# Altium PCB pcbgirl.pcbdoc
Units mil, origin at the board's own origin, x right, y up, seen from the top; angles counter-clockwise.
Board outline 5920 x 6080 mil, 2 copper layers (Top Layer, Bottom Layer); 2 components, 78 nets, 140 pads, 0 vias.
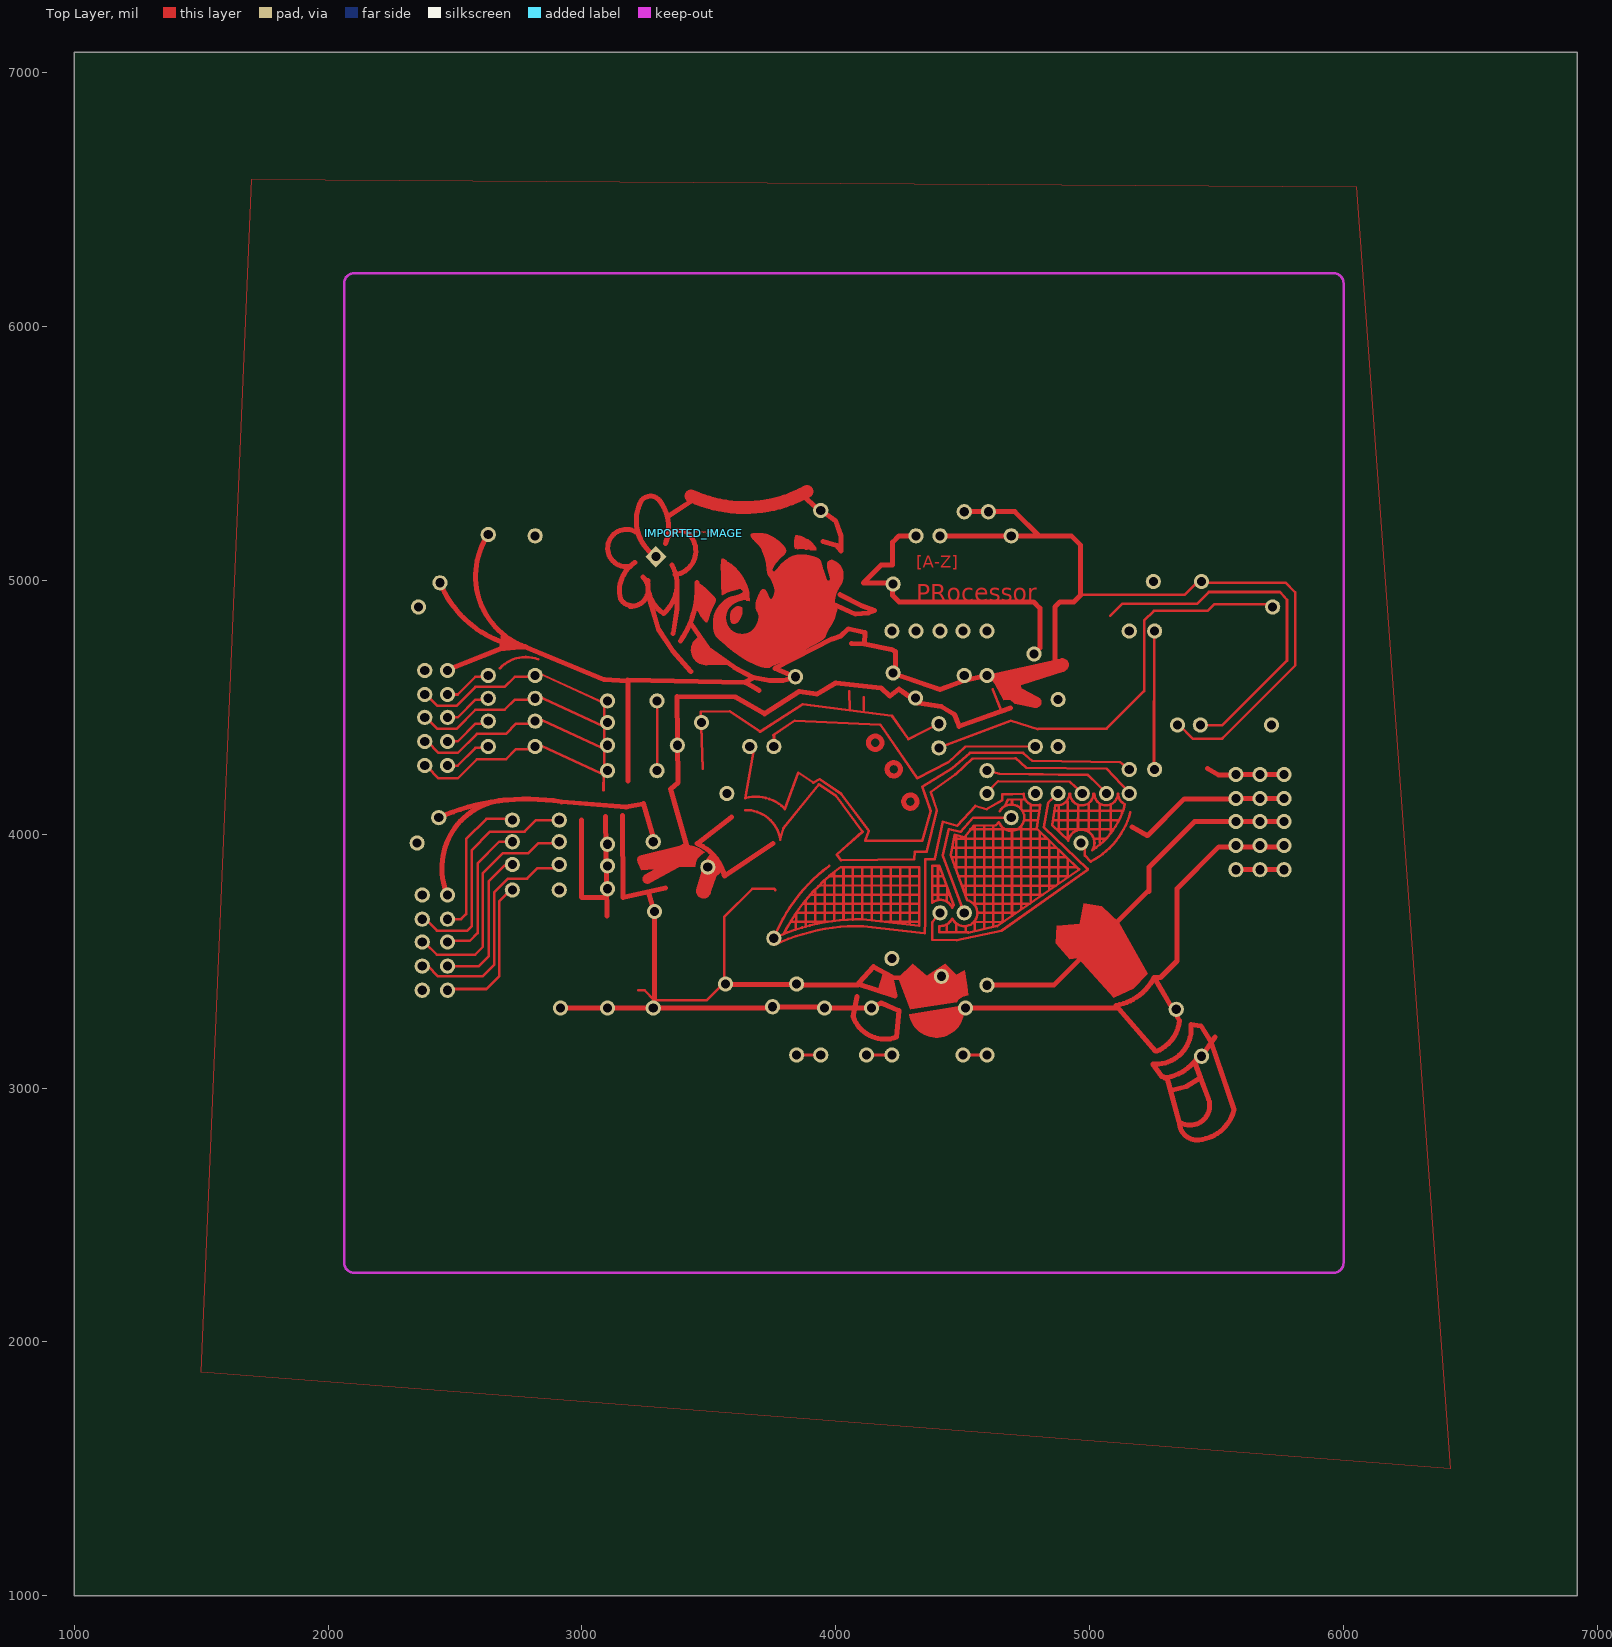
[diagram p0: Top Layer view]
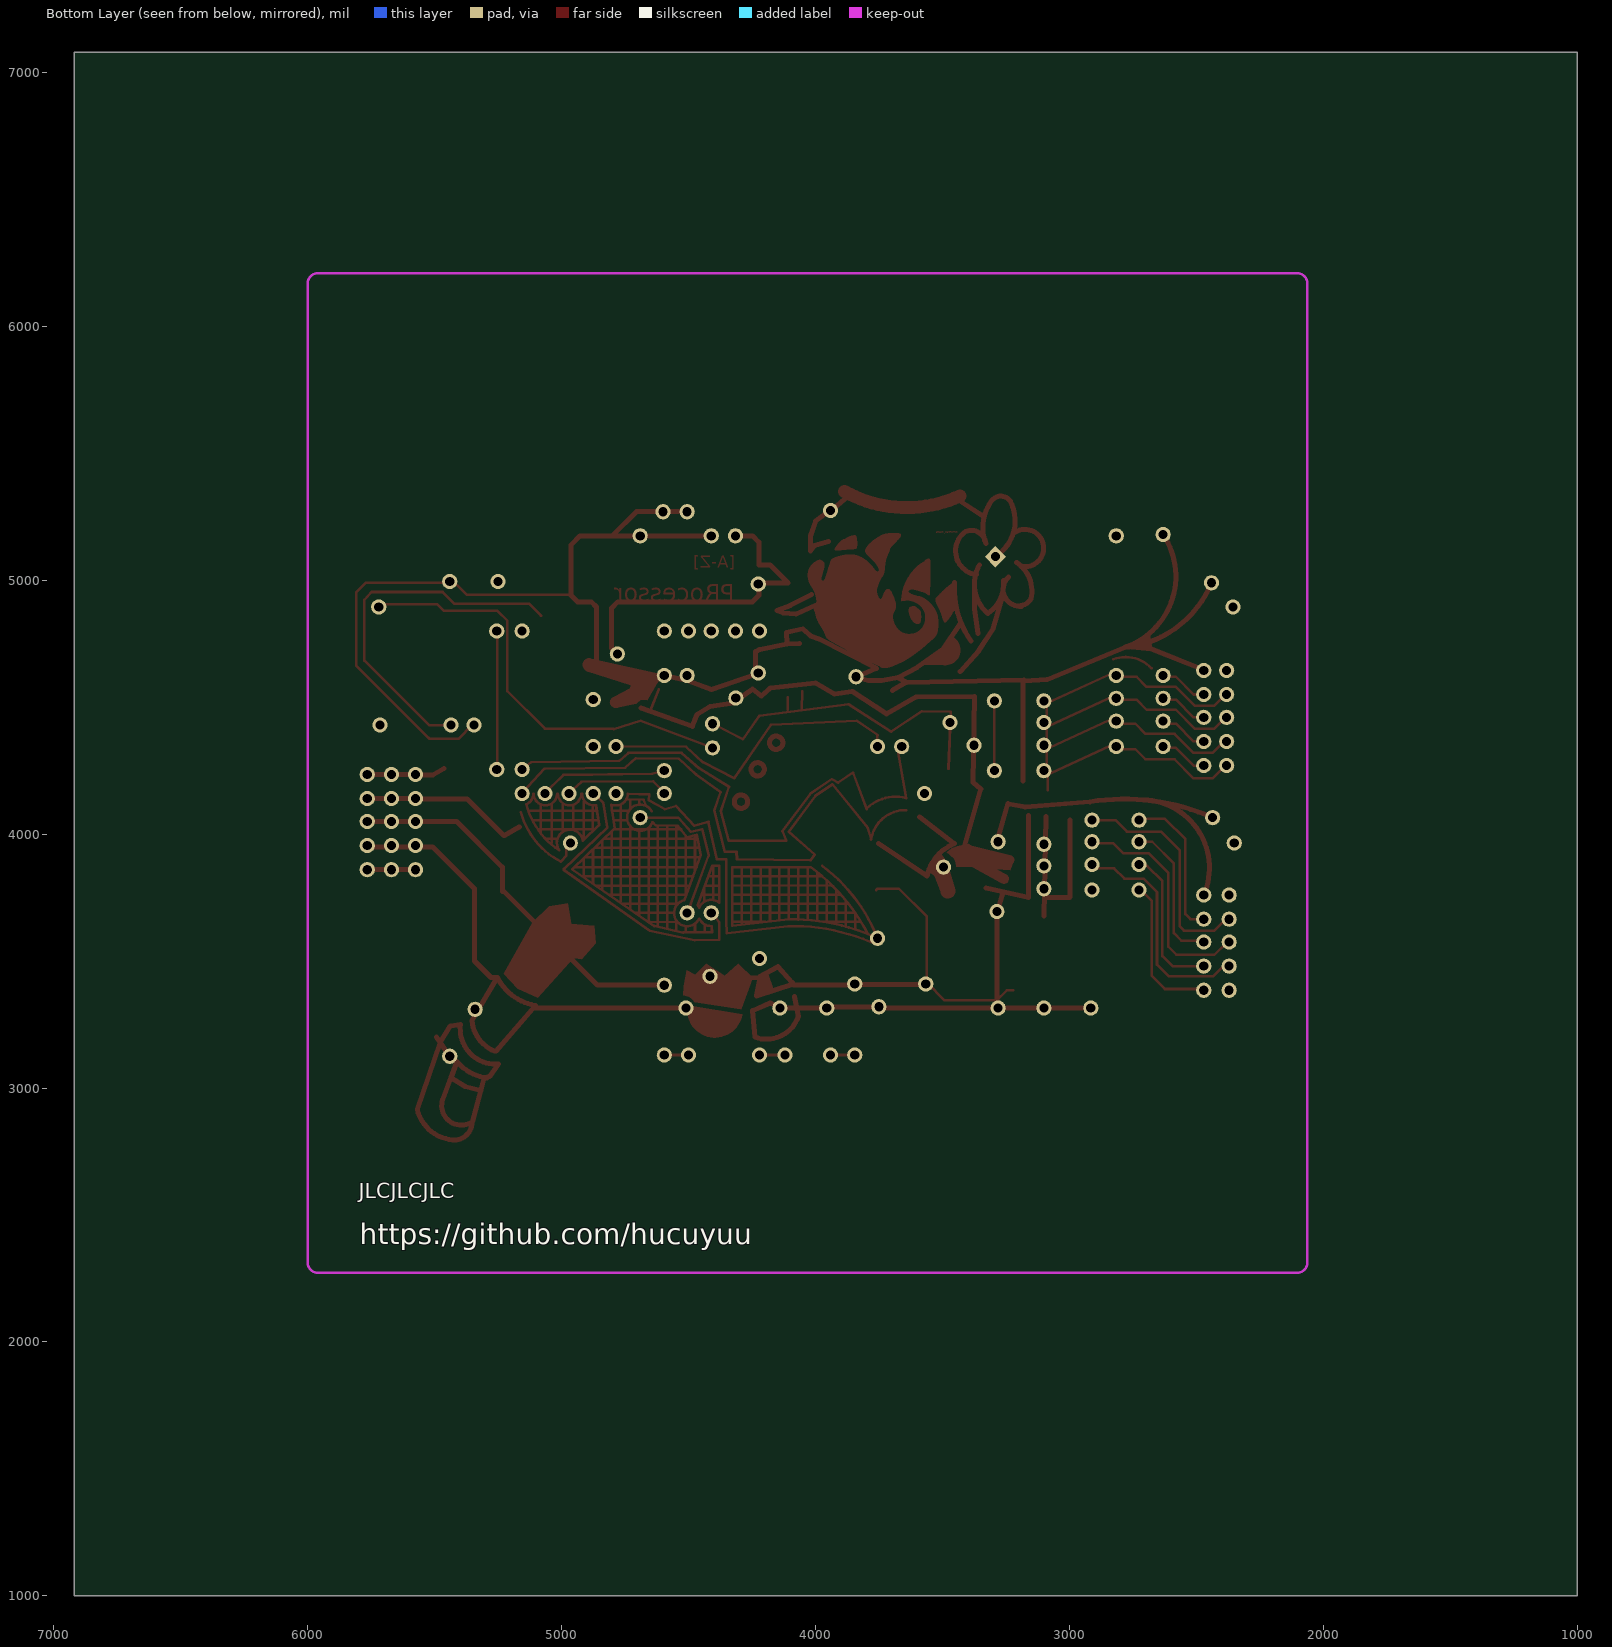
[diagram p1: Bottom Layer view, seen from below]

## Layer stack, top to bottom
Top Layer: signal copper (thickness not stored)
Dielectric: dielectric 12.6, FR-4, Dk 4.8
Bottom Layer: signal copper (thickness not stored)

## Board outline
6920,1000 1000,1000 1000,7080 6920,7080

## Components (designator, comment, footprint, x,y, rotation, side; value= is the part's Value field where it differs from the comment)
IMPORTED_IMAGE "IMPORTED_IMAGE" IMPORTED_IMAGE#1 3439.87,5185.12 r0 top
IMPORTED_IMAGE "IMPORTED_IMAGE" IMPORTED_IMAGE#2 3439.87,5185.12 r0 top

## Footprints (in the part's own frame and the unit in brackets; to place one, negate y for a bottom-side part, rotate by r counter-clockwise, add the part's x,y. Pads: shape width x height; smd on the part's side, far side on the other; paste and mask are expansions set on the pad)
IMPORTED_IMAGE#1 [mil]
  Top Layer region: 3971 vertices and 2 holes, not listed, extent 77.24,-530.3 590.25,0.05
  Top Layer region: 385 vertices and 0 holes, not listed, extent 144.66,-356.04 192.24,-287.46
  Top Layer region: 387 vertices and 0 holes, not listed, extent 0,-350.84 87.07,-195.17
  Top Layer region: 161 vertices and 0 holes, not listed, extent 359.86,-210.28 403.08,-144.16
  Top Layer region: 385 vertices and 0 holes, not listed, extent 396.42,-67.12 483.82,-8.3
IMPORTED_IMAGE#2 [mil]

## Free pads (board coordinates)
  round 60 hole 36: 1(2370.67,3760.06) 1(2380.67,4645.06) 1(2470.67,3760.06) 1(2470.67,4645.06) 1(5575.67,4235.06) 1(5670.67,4235.06) 1(5765.67,4235.06) 2(2370.67,3665.06) 2(2380.67,4550.06) 2(2470.67,3665.06) 2(2470.67,4550.06) 2(5575.67,4140.06) 2(5670.67,4140.06) 2(5765.67,4140.06) 3(2370.67,3575.06) 3(2380.67,4460.06) 3(2470.67,3575.06) 3(2470.67,4460.06) 3(5575.67,4050.06) 3(5670.67,4050.06) 3(5765.67,4050.06) 4(2370.67,3480.06) 4(2380.67,4365.06) 4(2470.67,3480.06) 4(2470.67,4365.06) 4(5575.67,3955.06) 4(5670.67,3955.06) 4(5765.67,3955.06) 5(2370.67,3385.06) 5(2380.67,4270.06) 5(2470.67,3385.06) 5(2470.67,4270.06) 5(5575.67,3860.06) 5(5670.67,3860.06) 5(5765.67,3860.06) 6(2355.67,4895.06) 7(2440.67,4990.06) 8(2630.67,5180.06) 9(2815.67,5175.06) 11(3940.67,5275.06) 12(3840.67,4620.06) 13(4225.67,4985.06) 14(4315.67,5175.06) 15(4410.67,5175.06) 16(4690.67,5175.06) 17(4505.67,5270.06) 18(4600.67,5270.06) 19(5250.67,4995.06) 20(5440.67,4995.06) 21(5720.67,4895.06) 22(5255.67,4800.06) 23(5155.67,4800.06) 24(5715.67,4430.06) 25(5435.67,4430.06) 26(5345.67,4430.06) 27(4780.67,4710.06) 28(4595.67,4800.06) 29(4220.67,4800.06) 30(4315.67,4800.06) 31(4410.67,4800.06) 32(4500.67,4800.06) 33(2630.67,4625.06) 33(2725.67,4055.06) 33(2815.67,4625.06) 33(2910.67,4055.06) 33(3100.67,3960.06) 33(3100.67,4525.06) 34(2630.67,4535.06) 34(2725.67,3970.06) 34(2815.67,4535.06) 34(2910.67,3970.06) 34(3100.67,3875.06) 34(3100.67,4440.06) 35(2630.67,4445.06) 35(2725.67,3880.06) 35(2815.67,4445.06) 35(2910.67,3880.06) 35(3100.67,3785.06) 35(3100.67,4350.06) 36(2630.67,4345.06) 36(2725.67,3780.06) 36(2815.67,4345.06) 36(2910.67,3780.06) 36(3100.67,4250.06) 37(2915.67,3315.06) 38(3100.67,3315.06) 39(3280.67,3315.06) 40(3285.67,3695.06) 41(3280.67,3970.06) 42(3295.67,4250.06) 43(3295.67,4525.06) 44(3375.67,4350.06) 45(3470.67,4440.06) 46(3570.67,4160.06) 47(3660.67,4345.06) 48(3755.67,4345.06) 49(3565.67,3410.06) 50(3845.67,3410.06) 51(3750.67,3320.06) 52(3955.67,3315.06) 53(4140.67,3315.06) 54(4220.67,3510.06) 55(3845.67,3130.06) 56(3940.67,3130.06) 57(4120.67,3130.06) 58(4220.67,3130.06) 59(4500.67,3130.06) 60(4595.67,3130.06) 61(2350.67,3965.06) 62(2435.67,4065.06) 63(5340.67,3310.06) 64(5440.67,3125.06) 65(4595.67,3405.06) 66(4510.67,3315.06) 67(4415.67,3440.06) 68(3755.67,3590.06) 69(4410.67,3690.06) 70(4505.67,3690.06) 71(4965.67,3965.06) 72(4690.67,4065.06) 73(4595.67,4250.06) 74(4595.67,4160.06) 75(4785.9,4160.06) 76(4875.67,4160.06) 77(4970.67,4160.06) 78(5065.67,4160.06) 79(5155.67,4160.06) 80(5155.67,4255.06) 81(5255.67,4255.06) 82(4225.67,4635.06) 83(4505.67,4625.06) 84(4595.67,4625.06) 85(4405.67,4340.06) 86(4405.67,4435.06) 87(4785.67,4345.06) 88(4875.67,4345.06) 89(4875.67,4530.06) 90(3495.67,3870.06) 91(4314.05,4536.05)
  rect 60x60 hole 36 rot 45: 10(3291.34,5093.06)

## Nets (pads, with @x,y where several pads share a name; then routed paths per layer and width w, separated by ;. In a path a pad name is that pad's centre, name@x,y a point inside that pad or via, vN(x,y) a via of type N, cw(c..) or ccw(c..) an arc to the next point about the centre after c; other vN are vias at no path point)
GND: 
N$789: pad.2@2470.67,4550.06 pad.33@2630.67,4625.06
N$792: pad.3@2470.67,4460.06 pad.34@2630.67,4535.06
N$795: pad.2@2380.67,4550.06 pad.33@2815.67,4625.06
N$798: pad.3@2380.67,4460.06 pad.34@2815.67,4535.06
N$801: pad.4@2470.67,4365.06 pad.35@2630.67,4445.06
N$804: pad.5@2470.67,4270.06 pad.36@2630.67,4345.06
N$807: pad.4@2380.67,4365.06 pad.35@2815.67,4445.06
N$810: pad.5@2380.67,4270.06 pad.36@2815.67,4345.06
S$819:  | length 756
  Top Layer w10: 2470.67,4270.06 2510.67,4270.06 2580.67,4340.06 2630.67,4340.06 ; 2470.67,4365.06 2510.67,4365.06 2580.67,4435.06 2630.67,4435.06 ; 2470.67,4460.06 2510.67,4460.06 2580.67,4530.06 2630.67,4530.06 ; 2470.67,4550.06 2510.67,4550.06 2580.67,4620.06 2630.67,4620.06
S$839:  | length 2005.1
  Top Layer w10: 2380.67,4460.06 2385.67,4460.06 2430.67,4415.06 2505.67,4415.06 2580.67,4490.06 2695.67,4490.06 2735.67,4530.06 2815.67,4530.06 ; 2380.67,4550.06 2385.67,4550.06 2430.67,4505.06 2505.67,4505.06 2580.67,4580.06 2695.67,4580.06 2735.67,4620.06 2815.67,4620.06 ; 2385.67,4265.06 2390.67,4265.06 2435.67,4220.06 2510.67,4220.06 2585.67,4295.06 2700.67,4295.06 2740.67,4335.06 2820.67,4335.06 ; 2385.67,4365.06 2390.67,4365.06 2435.67,4320.06 2510.67,4320.06 2585.67,4395.06 2700.67,4395.06 2740.67,4435.06 2820.67,4435.06
S$872: pad.36@3100.67,4250.06 | length 1481.9
  Top Layer w10: 2813.59,4360.06 pad.36@3073.59,4240.06 ; 2818.59,4460.06 3078.59,4340.06 ; 2823.59,4545.06 3083.59,4425.06 ; 2828.59,4635.06 3088.59,4515.06 3088.59,4262.14 pad.36@3100.67,4250.06 ; 3084.77,4172.66 pad.36@3085.47,4239.16
S$892:  | length 591.4
  Top Layer w10: 2473.57,3665.06 2523.57,3665.06 2543.57,3685.06 2543.57,3980.06 2623.57,4060.06 2728.57,4060.06
S$896:  | length 572.6
  Top Layer w10: 2473.57,3580.06 2558.57,3580.06 2588.57,3610.06 2588.57,3885.06 2673.57,3970.06 2723.57,3970.06
S$898:  | length 586.4
  Top Layer w10: 2468.57,3480.06 2593.57,3480.06 2633.57,3520.06 2633.57,3815.06 2693.57,3875.06 2718.57,3875.06
S$900:  | length 579.4
  Top Layer w10: 2473.57,3390.06 2623.57,3390.06 2674.97,3441.46 2674.97,3736.46 2718.57,3780.06
S$902:  | length 914.6
  Top Layer w10: 2368.57,3665.06 2383.57,3665.06 2428.57,3620.06 2548.57,3620.06 2564.97,3636.46 2564.97,3936.46 2638.57,4010.06 2773.57,4010.06 2818.57,4055.06 2908.57,4055.06
S$904:  | length 915.8
  Top Layer w10: 2363.57,3570.06 2383.57,3570.06 2428.57,3525.06 2578.57,3525.06 2609.97,3556.46 2609.97,3846.46 2688.57,3925.06 2788.57,3925.06 2828.57,3965.06 2908.57,3965.06
S$907:  | length 905.8
  Top Layer w10: 2368.57,3480.06 2393.57,3480.06 2433.57,3440.06 2608.57,3440.06 2654.97,3486.46 2654.97,3771.46 2708.57,3825.06 2783.57,3825.06 2823.57,3865.06 2893.57,3865.06 2908.57,3880.06
S$909:  | length 893.2
  Top Layer w10: 3221.32,3385.06 3246.32,3385.06 3286.32,3345.06 3491.32,3345.06 3561.32,3415.06 3561.32,3675.06 3671.32,3785.06 3756.32,3785.06 3761.32,3780.06
S$937: pad.59 pad.60 | length 95
  Top Layer w10: pad.59 pad.60
S$940: pad.57 pad.58 | length 100
  Top Layer w10: pad.57 pad.58
S$943: pad.55 pad.56 | length 95
  Top Layer w10: pad.55 pad.56
S$985:  | length 392.9
  Top Layer w10: 3935.67,3796.93 4328.59,3798.7
S$987:  | length 423
  Top Layer w10: 3901.97,3761 4324.92,3762.01
S$989:  | length 450
  Top Layer w10: 3873.56,3726.1 4323.59,3726.1
S$991:  | length 480.6
  Top Layer w10: 3847.96,3691.18 4328.59,3690.19
S$997:  | length 353.9
  Top Layer w10: 3974.67,3833.61 4328.59,3834.61
S$1003: pad.75 pad.76 | length 5905.8
  Top Layer w10: 3757.39,3563.88 cw(c4093.77,2839.39) 4107.81,3638.04 ; 3794.82,3606.98 cw(c4452.61,3273.01) 4019.3,3870.06 ; 3821.66,3655.28 3968.9,3655.27 ; 3842.68,3626.3 3843.67,3689.76 ; 3880.96,3636.18 3880.96,3736.53 ; 3918.26,3650.06 3918.27,3780.77 ; 3955.57,3652.64 3955.57,3818.02 ; 3973.59,3875.06 ccw(c4369.49,3346.53) 3755.67,3590.06 cw(c4092.05,2865.57) 4106.09,3664.22 ; 3992.86,3848.75 3992.88,3658.08 ; 4021.06,3869.53 4326.19,3869.93 ; 4030.19,3662.39 4030.18,3866.39 ; 4067.49,3663.77 4067.49,3866.46 ; 4103.59,3665.04 4328.57,3640.1 4328.57,3655.28 4197.24,3655.28 ; 4104.79,3670.06 4104.79,3866.46 ; 4107.77,3638.06 4349.47,3609.06 4351.87,3658.96 4351.87,3901.46 4389.87,3901.46 4421.67,4048.26 4477.67,4032.26 4549.67,4110.96 4593.67,4098.96 4656.37,4133.56 4655.07,4156.26 4739.86,4159.71 ; 4142.09,3660.76 4142.09,3866.46 ; 4179.39,3657.8 4179.39,3866.46 ; 4216.68,3653.86 4216.69,3866.46 ; 4253.99,3656.7 4253.99,3866.46 ; 4291.29,3649.92 4291.29,3866.46 ; 4328.59,3645.15 4328.59,3870.06
S$1096: pad.4@5575.67,3955.06 pad.4@5765.67,3955.06 pad.64 | length 4257.9
  Top Layer w19.68: 4510.67,3315.06 5103.59,3315.06 ; 5258.59,3145.06 5103.59,3325.06 ccw(c5066.78,3532.53) 5253.59,3435.06 ; 5264.22,3145.2 ccw(c5209.01,3279.62) 5353.59,3265.06 5253.59,3435.06 ; 5293.59,3040.06 ccw(c5272.36,3222) pad.64@5433.59,3135.06 ; 5318.59,2990.06 5378.59,3005.06 5436.19,3040.51 5412.5,3104.04 ; 5353.18,2865.85 ccw(c5423.77,2865.65) 5423.59,2795.06 ; 5417.68,2795.32 ccw(c5416.91,2951.26) 5568.59,2915.06 5478.59,3180.06 ; 5434.63,3044.67 5468.59,2955.06 cw(c5395.15,2930.82) 5351.06,2867.29 5304.75,3041.71 5283.59,3045.06 5248.59,3095.06 ccw(c5261.06,3233.07) 5398.59,3250.06 5438.59,3245.06 5478.59,3180.06 ; pad.64 5478.59,3180.06 ; 5478.57,3180.06 5493.57,3200.06 ; pad.4@5575.67,3955.06 pad.4@5570.67,3950.06 ; pad.4@5765.67,3955.06 5760.67,3950.06 pad.4@5570.67,3950.06 ; 5253.59,3435.06 5278.59,3435.06 5343.59,3500.06 5343.59,3785.06 5508.59,3950.06 pad.4@5570.67,3950.06
S$1120: pad.1@5575.67,4235.06 pad.1@5765.67,4235.06 | length 309.4
  Top Layer w19.68: 5463.8,4258.72 5507.76,4233.18 pad.1@5576.28,4233.18 ; pad.1@5575.67,4235.06 pad.1@5765.67,4235.06
S$1123: pad.2@5575.67,4140.06 pad.2@5765.67,4140.06 | length 667.6
  Top Layer w19.68: 5165.71,4028.49 5227.27,3993.86 5372.67,4139.26 pad.2@5573.97,4139.26 ; pad.2@5575.67,4140.06 pad.2@5765.67,4140.06
S$1126: pad.3@5575.67,4050.06 pad.3@5765.67,4050.06 pad.65 | length 1492.8
  Top Layer w19.68: pad.65 4858.57,3405.06 5228.57,3775.06 5233.57,3775.06 5233.57,3870.06 5413.57,4050.06 5575.67,4050.06 pad.3@5765.67,4050.06
S$1131: pad.5@5575.67,3860.06 pad.5@5765.67,3860.06 | length 190
  Top Layer w19.68: pad.5@5575.67,3860.06 pad.5@5765.67,3860.06
S$1140: pad.42 pad.43 | length 275
  Top Layer w10: pad.42 pad.43
S$1158: pad.13 pad.14 pad.27 | length 1291.6
  Top Layer w19.68: pad.14 4248.59,5175.06 4223.59,5150.06 4223.59,5060.06 4178.59,5060.06 4108.59,4990.06 4220.67,4990.06 pad.13 4223.59,4982.98 4223.59,4940.06 4248.59,4915.06 4778.59,4915.06 4803.59,4890.06 4803.59,4732.98 pad.27
S$1203: pad.49 pad.50 | length 968.6
  Top Layer w19.68: pad.49@3564.49,3408.03 3838.56,3408.03 3840.42,3406.18 4086.71,3406.18 4088.57,3408.03 4086.58,3409.89 4233.01,3362.74 4218.01,3433.46 4264.49,3435.81 ; 4091.57,3414.86 4147.97,3477.76 4220.87,3437.76
S$1404: pad.48 pad.87 | length 1241.1
  Top Layer w10: pad.48@3756.45,4345.28 3756.45,4388.28 3754.45,4390.28 3838.45,4447.28 4175.45,4431.28 4320.41,4220.02 4442.63,4282.98 4509.3,4344.09 pad.87@4781.52,4345.94
S$1408:  | length 495.9
  Top Layer w19.68: 4181.31,4360 ccw(c4155,4360) 4181.31,4360 ; 4254.35,4255.43 ccw(c4228.04,4255.43) 4254.35,4255.43 ; 4319.9,4128.02 ccw(c4293.59,4128.02) 4319.9,4128.02
S$1542: pad.10
S$1545: pad.11 | length 824.4
  Top Layer w19.68: 3871.17,5332.46 pad.11@3943.27,5269.56 ; 3949.19,5152.64 4003.64,5136.71 4019.93,5115.97 4019.93,5174.12 3999.56,5233.75 pad.11@3959.56,5263.38
  Top Layer w51.18: 3430.14,5332.77 ccw(c3641.13,5785.79) 3886.85,5350.63
S$1588: pad.1@2470.67,4645.06 pad.12 pad.82 pad.83 pad.84 | length 7364.9
  Top Layer w10: 2676.52,4652.96 cw(c2777.4,4561.87) 2827.8,4688.1
  Top Layer w19.68: 2440.67,4990.06 ccw(c2824.16,5147.33) 2783.53,4734.84 ; pad.1@2471.14,4647.7 2676.69,4729.18 2774.84,4738.44 3087.8,4608.81 3178.54,4603.25 ; 2630.67,5180.06 ccw(c2876.48,5015.78) 2779.71,4736.42 ; 3181.95,4209.42 3181.95,4603.87 3178.62,4606.49 3643.36,4597.7 3697.06,4566.22 ; 3188.85,4897.63 ccw(c3194.22,4964.23) 3240.14,5012.77 ; 3190.19,5055 cw(c3174.72,5126.91) 3220.14,5184.77 ; 3209.14,5070.77 ccw(c3280.3,4959.03) 3151.85,4926.63 ccw(c3200.1,4955) 3236.67,4912.63 ; 3259.91,4999.3 ccw(c3396.8,4984.35) 3321.28,4869.2 ccw(c3221.75,4984.82) 3354.14,5060.62 ; 3260.44,4945.81 3300.75,4808.64 3356.75,4723.31 3430.09,4640.64 ; 3273.44,5106.66 cw(c3380.78,5234.52) 3232.72,5311.66 cw(c3270.01,5286.41) 3308.42,5309.91 ; 3308.43,5309.91 cw(c3166.88,5208.07) 3329.14,5144.2 cw(c3387.16,5138.07) 3408.87,5192.22 cw(c3354.03,5115.39) 3366.73,5021.85 ; 3336.94,5250.65 3449.67,5324.06 ; 3359.44,4790.23 3373.44,4887.23 3373.44,4994.23 ; 3387.82,4761 ccw(c3093.67,4967.57) 3452.29,4991.84 ; 3427.72,4832.53 3498.09,4728.64 3598.09,4657.97 3675.42,4616.64 ; 3641.47,4597.66 3675.47,4616.66 3739.47,4605.96 3791.47,4604.66 pad.12@3838.07,4619.26 ; pad.12@3835.57,4620.96 3759.57,4652.96 3986.57,4768.96 4019.57,4780.96 4049.57,4808.96 4114.57,4794.96 4112.57,4748.96 4062.57,4750.96 ; 4112.59,4748.99 4218.59,4727.99 4235.59,4718.99 pad.82@4235.59,4641.99 ; pad.82@4228.59,4631.99 4410.59,4569.99 4514.59,4607.99 pad.84@4576.59,4620.99
S$1648:  | length 311.4
  Top Layer w19.68: 4000.26,4900.94 4077.59,4866.27 4128.26,4871.61 4152.26,4880.94 4098.93,4900.94 4016.26,4943.61
S$1676: pad.86 | length 1347.4
  Top Layer w10: 3476.25,4256.8 3467.25,4481.8 3582.25,4483.8 3701.25,4403.8 3870.25,4511.8 4220.51,4467.09 4285.84,4373.76 pad.86@4395.18,4429.76 ; 4052.89,4562.74 4054.22,4489.41
S$1682:  | length 49.3
  Top Layer w10: 4110.22,4489.41 4110.22,4538.74
S$1689:  | length 166.4
  Top Layer w19.68: 3457.84,3965.91 3589.84,4067.24
S$1692:  | length 224.8
  Top Layer w19.68: 3565.84,3837.91 3752.5,3963.24
S$1697:  | length 174
  Top Layer w19.68: 3452.91,3962.58 cw(c3387.43,3797.74) 3560.84,3835.02
S$1709: pad.79 | length 2374.8
  Top Layer w10: 3642.52,4095.03 cw(c3645.15,3956.87) 3781.54,3979.01 ; 3781.44,3983.19 3793.77,4023.75 3933.36,4196.49 4000.36,4151.49 4105.36,4009.49 4003.36,3919.49 4020.36,3896.49 4309.36,3901.49 4311.36,3931.49 4357.36,3931.49 4398.36,4093.49 4374.36,4165.49 4470.66,4235.49 4538.66,4297.49 4707.66,4299.49 4749.67,4262.06 5066.66,4258.49 pad.79@5154.66,4163.49
S$1716: pad.47 pad.80 | length 2278.7
  Top Layer w10: 3643.08,4140.73 pad.47@3678.27,4342.59 ; 3643.23,4141.75 cw(c3685.35,3985.63) 3796.31,4103.26 ; 3798.67,4098.16 3852.37,4242.56 3910.37,4202.86 3935.87,4217.16 4020.47,4159.26 4130.27,4012.16 4115.27,3974.66 4341.17,3973.66 4373.07,4090.46 4340.77,4187.16 4458.77,4259.56 4527.97,4319.76 4737.27,4320.36 4773.47,4288.66 5119.44,4283.9 pad.80
S$1720:  | length 2162.6
  Top Layer w10: 4618.07,4570.06 4650.87,4486.56
  Top Layer w19.68: 3412.17,3957.48 3349.01,4178.54 3379.01,4203.27 3374.01,4542.27 3603.16,4541.13 3719.59,4473.99 3856.01,4562.56 3924.59,4551.85 4001.01,4596.13 4178.16,4576.13 4213.37,4543.27 4248.56,4571.05 4324.48,4517.35 4415.22,4502.53 4467.07,4471.05 4485.59,4424.76 4687.44,4496.98
S$1730:  | length 392.1
  Top Layer w19.68: 3092.8,4068.91 3099.47,3676.91
S$1732: pad.35@3100.67,3785.06 | length 407.3
  Top Layer w19.68: 2998.13,4055.57 2998.13,3751.57 2999.47,3750.24 3091.47,3750.24 pad.35@3098.13,3756.91
S$1736: pad.22 pad.81 | length 547.7
  Top Layer w10: pad.81@5253.17,4253.76 pad.22@5253.57,4801.46
S$1739: pad.15 pad.16 pad.17 pad.18 pad.20 pad.26 | length 3224
  Top Layer w10: 4962.27,4942.36 5373.27,4942.66 5424.47,4993.86 pad.20@5436.37,4993.86 ; pad.26@5350.67,4433.8 5350.67,4431.14 5406.67,4375.14 5521.34,4375.14 5524,4377.8 5524,4378.86 5809.66,4664.51 5809.66,4952.51 5770.99,4991.18 5438.99,4991.18 pad.20@5436.32,4993.84
  Top Layer w19.68: pad.15 pad.16 ; pad.17 pad.18 4705.18,5270.06 4800.18,5175.06 ; pad.16@4689.97,5174.96 4927.87,5174.96 4962.87,5139.96 4962.87,4939.96 4937.87,4914.96 4882.87,4914.96 4862.87,4894.96 4862.87,4669.96
S$1746: pad.25 | length 1436
  Top Layer w10: 5081.43,4860.71 5127.55,4906.83 5422.15,4906.83 5469.19,4953.86 5748.82,4953.86 5777.04,4923.42 5777.04,4683.72 5521.41,4428.09 pad.25@5434.08,4428.09
S$1750: pad.21 pad.85 | length 1705.4
  Top Layer w10: pad.85@4405.73,4341.06 4689.31,4447.49 4795.73,4413.92 4797.16,4415.35 5066.45,4415.35 5214.31,4563.21 5214.31,4841.06 5252.88,4879.64 5464.31,4879.64 5490.73,4906.06 pad.21@5720.02,4906.06
S$1760:  | length 1017.5
  Top Layer w19.68: 2435.67,4065.06 cw(c2783,3279.54) 2918.84,4127.61 ; 2470.67,3760.06 cw(c2716.47,3867.18) 2708.57,4135.19
S$1790:  | length 335.4
  Top Layer w10: 4693.93,3678.65 4693.94,4014.06
S$1792:  | length 326.8
  Top Layer w10: 4730.43,3705.06 4730.47,4031.81
S$1795:  | length 378
  Top Layer w10: 4766.98,3736.56 4766.99,4114.56
S$1797:  | length 253.5
  Top Layer w10: 4803.51,3754.66 4803.51,4008.19
S$1799:  | length 193.3
  Top Layer w10: 4840.03,3780.81 4840.05,3974.06
S$1801:  | length 132.5
  Top Layer w10: 4876.52,3806.03 4876.53,3938.53
S$1803:  | length 367.6
  Top Layer w10: 4657.41,3654.69 4657.4,4022.33
S$1805:  | length 395.8
  Top Layer w10: 4620.87,3637.38 4620.88,4033.16
S$1807:  | length 406.4
  Top Layer w10: 4584.34,3627.06 4584.35,4033.46
S$1809: pad.70 pad.71 pad.72 | length 11488.2
  Top Layer w10: 4379.55,3730.37 cw(c4411.37,3689.65) 4458.2,3711.49 ; 4379.77,3583.76 4475.67,3582.56 4653.27,3619.76 ; 4379.8,3729.96 4379.8,3875.66 4406.67,3876.06 4463.67,3720.06 ; 4402.31,3742.73 4402.31,3871.73 ; 4408.07,3637.62 4407.88,3612.99 4521.67,3612.58 4636.18,3638.28 4958.47,3860.96 4791.47,4022.46 4805.47,4115.96 ; 4411.31,3637.98 ccw(c4411.31,3689.66) 4457.76,3667 ; 4437.15,3612.89 4437.15,3643.96 ; 4437.64,3737.66 4438.04,3790.06 ; 4455.67,3909.47 4905.91,3909.48 ; 4458.67,3945.99 4868.47,3946 ; 4458.68,3710.8 cw(c4505.51,3688.97) 4463.7,3719.34 ; 4458.89,3667.09 ccw(c4505.72,3688.93) 4517.35,3739.28 ; 4467.29,3982.52 4831.1,3982.52 ; 4468.9,3869.53 4943.67,3869.53 ; 4474.76,3617.57 4474.76,3641.57 ; 4482.67,3834.61 4919.67,3834.61 ; 4496.58,3796.93 4865.75,3796.93 ; pad.70@4505.4,3688.64 4421.45,3915.81 4445.66,4019.75 4490.66,4008.7 4540.39,4064.49 pad.72@4690.13,4063.96 ; 4511.2,3762.01 4815.35,3762.01 ; 4511.3,3616.07 4511.3,3637.07 ; 4517.31,3738.75 4452.27,3917.76 4468.67,3998.16 4506.07,3988.06 4543.67,4033.96 4630.17,4035.16 4642.17,4047.46 ; 4529.75,4019.04 4791.08,4019.02 ; 4547.64,3653.86 4653.94,3655.28 ; 4547.81,3720.06 4547.84,4033.96 ; 4547.84,3622.57 4547.83,3655.07 ; 4551.59,3726.1 4763.73,3726.1 ; 4559.45,3691.18 4711.49,3691.18 ; 4642.21,4047.47 ccw(c4690.77,4065.14) 4646.02,4090.98 ; 4652.55,3619.76 4992.67,3859.97 4991.39,3863.27 4819.54,4026.64 4836.67,4124.06 4875.67,4160.06 ; 4667.98,4112.9 4677.72,4135.26 4745.08,4137.11 ; 4693.94,4117.26 4693.94,4133.27 ; 4730.43,4098.74 4730.43,4135.26 ; 4735,4092.05 4801.67,4092.06 ; 4739.96,4159.15 ccw(c4785.9,4158.97) 4803.85,4116.69 ; 4742.04,4055.55 4791.73,4055.55 ; 4855.87,4055.56 5113.67,4055.55 ; 4861.91,4092.05 5129.92,4091.26 5131.25,4092.05 ; 4864.77,4114.16 4852.17,4036.06 4916.27,3974.86 ; 4865.35,4113.77 ccw(c4873.33,4159.01) 4919.26,4159.18 ; 4875.87,4019.02 5091.67,4019.02 ; 4877.29,4015.19 4877.29,4111.69 ; 4913.03,3981.16 4913.03,4127.16 ; 4916.29,3974.87 cw(c4967.18,3965.9) 5009.51,3936.26 ; 4923.05,4159.5 ccw(c4968.98,4159.5) 5014.92,4159.5 ; 4953.81,4018.46 4954.61,4114.49 ; pad.71@4964.17,3962.06 4981.27,3945.06 4981.27,3915.56 5003.27,3893.06 ; 4996.12,4010.81 4996.12,4122.36 ; 5004.07,3891.92 ccw(c4862.52,4165.71) 5160.41,4086.6 ; 5009.4,3936.09 ccw(c4841.76,4192.03) 5138.59,4117.91 ; 5016.14,3982.52 5061.42,3982.52 ; 5018.23,4159.27 ccw(c5064.16,4159.27) 5110.1,4159.27 ; 5038.65,3965.25 5038.65,4118.95 ; 5083.17,4004.25 5083.17,4116.96 ; 5111.65,4159.73 ccw(c5157.58,4159.56) 5138.17,4117.93
S$1811:  | length 234
  Top Layer w10: 4511.3,3758.06 4511.28,3992.06
S$1840:  | length 90.5
  Top Layer w10: 4379.8,3583.72 4380.17,3652.24 4392.03,3670.76
S$1842: pad.69
S$1851:  | length 137.5
  Top Layer w10: 4474.76,3858.58 4474.76,3996.06
S$1942:  | length 70.9
  Top Layer w10: 4913.03,3831.02 4913.03,3901.95
S$1989: pad.74 pad.77 | length 415.4
  Top Layer w10: pad.74@4597.37,4158.36 4597.37,4166.26 4639.47,4208.36 4922.17,4206.06 pad.77@4970.87,4162.66
S$1999: pad.73 pad.78 | length 505.2
  Top Layer w10: pad.73 4644.07,4237.06 4993.07,4233.06 pad.78@5069.17,4159.16
S$3596:  | length 486.5
  Top Layer w19.68: 2918.84,4127.61 3175.57,4107.86 3172.41,4106.83 3242.78,4119.79 3285.37,3971.64
S$3696: pad.37 pad.38 pad.39 pad.40 pad.51 pad.52 pad.53 | length 2695.7
  Top Layer w19.68: pad.37 pad.38 pad.39 ; 3160.23,4072.72 3160.64,3751.03 3328.2,3788.29 ; 3261.48,3771.41 pad.40@3282.49,3699.72 ; pad.40 3285.67,3315.06 pad.39 ; 4067.34,3281.31 4083.59,3360.06 ; 4068.59,3280.06 ccw(c4193.75,3325.4) 4238.59,3200.06 4248.59,3305.06 4178.59,3335.06 pad.53 pad.52 3950.67,3320.06 pad.51 3745.67,3315.06 pad.39
S$3985:  | length 155.1
  Top Layer w10: 4381.09,3834.61 4421.65,3834.61 ; 4382.5,3762.01 4445.58,3762.01 ; 4384,3796.93 4435.43,3796.93

## Polygon pours and split planes (outlines as drawn)
GND on Top Layer (solid): 1700,6580 6050,6550 6420,1500 1500,1880

## Keep-outs
Keep-Out Layer:
  lines w10: 2062.99,2311.73 ccw(c2102.36,2311.73) 2102.36,2272.36 ; 2062.99,6170 cw(c2102.36,6170) 2102.36,6209.37 ; 5960.63,2272.36 ccw(c5960.63,2311.73) 6000,2311.73 ; 5960.63,6209.37 cw(c5960.63,6170) 6000,6170

## Other copper
Top Layer:
  region net S$1203: 4155.87,3388.46 4164.72,3385.74 4187.29,3454.89 4222.29,3433.46 4228.01,3366.32 4164.72,3385.74 4164.44,3384.89 4155.87,3388.46
  region net S$937: 4503.83,3326.17 cw(c4396.43,3307.65) 4289.02,3289.14 cw(c4289.18,3289.59) 4289.31,3290.06 4503.83,3326.17
  region net S$1203: 4246.57,3435.26 4303.9,3489.93 4358.57,3441.93 4430.57,3488.59 4474.57,3445.93 4507.9,3464.59 4518.57,3400.59 4521.33,3364.7 4507.19,3360.96 4499.85,3359.09 4493.04,3355.38 4488.23,3351.87 4482.89,3347.05 4475.9,3337.93 4294.57,3309.93 4293.23,3309.93
  region net S$1126: 5095.01,3354.71 5172.42,3391.68 5228.35,3449.38 5113.68,3652.05 5048.35,3716.05 4976.35,3728.05 4961.68,3648.05 4871.01,3640.05 4865.68,3569.38 4921.68,3506.71 4951.01,3510.71 4972.35,3490.71
  region: 2683.01,4786.65 2673.73,4730.22 2763.73,4739.5
  pour cut-out net S$1545: 199 vertices and 0 holes, not listed, extent 3102.31,4873.73 3448.61,5333.36
  region net S$1588: 3517.48,4672.56 cw(c3488.91,4725.06) 3460.34,4777.56 cw(c3461.76,4777.19) 3463.19,4776.85 3517.48,4672.56
  region net S$1588: 3486.05,4666.85 3588.19,4665.42 3498.91,4725.42 3463.91,4777.56
  region net S$1588: 4597.64,4628.6 4883.64,4691.6 4901.64,4642.1 4728.64,4585.6 4729.64,4574.1 4793.64,4541.1 4782.14,4498.1 4705.64,4514.6 4687.64,4528.6 4662.14,4527.6 4625.64,4593.1
  region net S$1588: 4883.71,4691.59 cw(c4892.04,4667.1) 4900.38,4642.6 cw(c4892.01,4651.6) 4883.64,4660.6 4883.71,4691.59
  region: 4793.42,4541.02 cw(c4787.68,4519.67) 4781.94,4498.31 cw(c4782.15,4504.18) 4782.36,4510.05 4793.42,4541.02
  region: 3269.69,3809.44 cw(c3257.65,3823.87) 3247.54,3839.72 3269.69,3809.44
  region net S$1692: 3561.46,3861.04 3529.65,3835.06 3507.51,3772.2 3449.65,3780.06 3470.97,3853.14 3511.79,3845.06 3469.65,3870.77 3502.69,3919.56
  region: 3507.56,3772.33 cw(c3478.77,3776.25) 3449.97,3780.16 3507.56,3772.33
  region: 3237.22,3881.68 cw(c3234.9,3898.92) 3232.57,3916.16 3237.22,3881.68
  pour cut-out net S$1545: 3471.94,5313.38 3522.94,5363.38 3769.94,5367.38 3846.94,5310.38 3663.94,5268.38 3668.94,5272.38
  pour cut-out net S$1746: 5763.76,4986.63 5723.02,4892.18 5806.35,4886.63 5804.5,4955.14
  pour cut-out net S$1746: 5353.09,4430.77 5506.09,4425.77 5554.59,4420.27 5513.09,4378.77 5395.09,4377.77
  pour cut-out net S$1746: 5431.23,4989.16 5342.34,4891.02 5740.49,4913.24 5760.86,4991.02
  pour cut-out net S$1739: 4249.23,5175.83 4928.04,5175.33 4964.04,5141.33 4966.79,4938.33 4935.31,4921.66 4251.55,4917.28 4221.05,4941.28 4222.55,5148.28
  pour cut-out net S$872: 2712.94,4283.17 2763.49,4300.93 2829.82,4297.63 3098.28,4191.17 3180.94,4193.84 3179.61,4593.84 3092.94,4599.17 2752.94,4740.5 2471.61,4636.5 2376.94,4641.84 2379.61,4239.17 2434.28,4212.5 2508.94,4212.5 2582.28,4288.5 2695.61,4287.17
  pour cut-out net S$1720: 3185.47,4213.06 3361.47,4220.06 3487.47,4257.39 3606.47,4320.06 3593.47,4341.06 3581.47,4341.06
  pour cut-out net S$1140: 3183.14,4221.9 3319.14,4212.57 3583.14,4332.57 3751.48,4455.57 3881.14,4603.9 3187.14,4605.9 3165.81,4537.9
  pour cut-out net S$904: 2362.82,3758.37 2462.82,3767.34 2462.82,3958.37 2478.82,3974.37 2478.82,4003.7 2568.16,4093.04 2628.23,4116 2682.82,4131.7 2890.82,4131.7 2909.49,4113.04 3056.16,4113.04 3058.82,4115.7 3177.49,4115.7 3178.82,4114.37 3178.82,4086.37 2753.49,4086.37 2733.49,4066.37 2733.49,3695.7 2712.16,3674.37 2712.16,3425.04 2702.82,3415.7 2702.82,3409.03 2641.49,3346.37 2405.49,3346.37 2365.49,3386.37 2365.49,3755.7 2362.82,3758.37
  pour cut-out net S$1203: 3576.32,3420.09 3567.32,3821.09 3542.76,3837.13 3529.32,3819.09 3536.32,3431.09 3537.32,3430.09
  pour cut-out net S$1588: 3719.81,4446.37 3760.71,4499.07 3767.18,4654.26 3856.65,4622.68 3760.71,4499.07 3759.28,4464.79 3882.97,4509.53 4214.55,4462.16 4277.7,4359.53 4414.55,4438.47 4414.55,4349 4688.23,4446.37 4793.49,4412.16 4880.34,4409.53 4872.44,4301.63 4501.39,4325.32 4314.55,4230.58 4172.44,4435.84 3719.81,4446.37
  pour cut-out net S$1588: 3790.26,4657.53 4045.52,4802.27 4113.94,4786.48 4129.73,4747.01 4234.99,4723.32 4227.1,4633.85 4408.68,4568.06 4503.42,4612.8 4579.73,4631.22 4642.89,4523.32 4682.36,4520.69 4692.89,4502.27 4684.99,4491.75 4482.36,4428.59 4466.57,4470.69 4408.68,4512.8 4311.31,4515.43 4245.52,4575.96 4211.31,4539.11 4179.73,4575.96 4008.68,4597.01 3853.42,4615.43
  pour cut-out net S$1404: 4724,4376.19 4318.73,4294.61 4171.37,4457.77 3692.42,4441.98 3897.68,4686.72 4192.42,4623.56 4513.47,4539.35
  pour cut-out net S$1203: 3674.38,3418.88 3797.04,3492.22 3810.38,3466.88 3899.71,3534.88 3918.38,3502.88 3994.38,3561.55 4023.71,3509.55 4085.04,3557.55 4107.71,3509.55 4182.38,3530.88 4229.04,3490.88 4293.04,3528.22 4362.38,3476.22 4433.04,3513.55 4477.04,3465.55 4543.71,3510.88 4603.71,3485.55 4669.04,3546.88 4737.04,3530.88 4770.38,3604.22 4838.38,3589.55 4849.04,3658.88 4938.38,3664.22 4951.71,3741.55 5050.38,3732.22 5057.04,3817.55 5133.04,3816.22 5114.38,3902.88 5205.04,3909.55 5190.38,3994.88 5233.04,3998.88 5370.38,4138.88 5777.04,4140.22 5771.71,4049.55 5511.71,3948.22 5345.04,3793.55 5345.04,3504.22 5279.71,3432.22 5253.04,3432.22 5191.71,3361.55 5113.04,3328.22 5090.38,3312.22 4510.38,3308.22 4114.38,3313.55 3566.38,3317.55 3574.38,3404.22 3633.04,3410.88
  pour cut-out net S$1131: 5572.9,3958.53 5576.6,3862.24 5776.6,3860.39 5774.75,4245.57 5576.6,4247.42
  pour cut-out net S$1126: 5102.71,3341.53 5245.38,3445.53 5342.71,3302.87 5360.04,3260.2 5437.38,3244.2 5490.71,3138.87 5573.38,2912.2 5534.71,2844.2 5474.71,2809.53 5386.71,2801.53 5357.38,2842.87 5301.38,3030.87 5262.71,3056.2 5249.38,3093.53 5257.38,3100.2 5256.04,3140.2 5090.71,3337.53
  pour cut-out net S$3696: 4125.93,3358.06 4241.72,3300.16 4228.56,3194.9 4123.3,3218.58 4057.51,3308.06
  region net S$1720: 3232.81,3916.3 3384.73,3953.48 3398.23,3961.48 3442.48,3951.73 3462.6,3943.85 3483.98,3929.2 3468.73,3917.2 3454.22,3902.23 3447.42,3886.54 3446.53,3870.85 3380.23,3868.98 3269.73,3809.48 3247.23,3839.98 3287.23,3861.98 3232.73,3856.98 3220.4,3890.06
  pour cut-out net S$3696: 2682.25,4097.8 3169.29,4094.09 3165.59,3738.54 2998.92,3749.65 3010.03,3775.58 2819.29,3779.28 2695.22,3668.17
  pour cut-out net S$1720: 3166.06,4105 3354.65,4158.92 3536.13,4214.48 3599.09,4318.18 3658.35,4307.07 3706.5,4144.11 3476.87,3977.44 3125.02,3844.11
  pour cut-out net S$1720: 3163.32,3898.19 3268.65,3902.19 3269.99,3776.86 3156.65,3759.52
  pour cut-out net S$1716: 3461.51,4044.58 3676.32,4155.69 3742.99,4075.14 3783.73,3983.47 3563.36,3846.43 3465.21,3961.25
  pour cut-out net S$1716: 3707.76,4144.75 3746.65,4137.34 3791.09,4111.41 3848.5,4239.19 3907.76,4207.71 3918.87,4179.93 3789.24,4020.67 3781.83,3989.19 3652.2,4104.01
  pour cut-out net S$1709: 4098.65,4001.16 4003.98,3926.49 4021.31,3895.82 4305.31,3899.82 4315.98,3931.82 4361.31,3941.16 4365.31,3990.49
  pour cut-out net S$1003: 4301.48,3948.22 4442.48,3926.22 4414.48,3845.22 4300.48,3842.22
  pour cut-out net S$1842: 4355.55,3727.37 4360.55,3698.87 4374.05,3702.87 4380.55,3719.87
  pour cut-out net S$1809: 4450.05,3699.37 4467.55,3698.37 4466.55,3675.37 4449.05,3677.87
  pour cut-out: 4446.32,3641.06 4458.32,3641.06 4463.12,3626.4 4445.66,3625.46
  pour cut-out net S$1999: 4534.43,4293.01 4585.1,4294.34 4605.1,4231.67 4631.77,4205.01 4618.43,4155.67 4646.43,4105.01 4641.1,4066.34 4546.43,4058.34 4510.43,4065.01 4470.43,4034.34 4425.1,4045.01 4386.43,4050.34 4394.43,4086.34 4374.43,4166.34 4533.1,4294.34
  pour cut-out net S$1676: 3569.45,4418.99 3935.24,4497.93 4314.19,4361.09 4435.24,3966.35 4153.66,3958.46 4103.66,4047.93 3998.4,4153.2 3935.24,4203.2 3819.45,4121.62 3669.45,4124.25
  pour cut-out net S$1120: 5521.6,4244.42 5322.4,4244.97 5292.78,4222.74 5348.33,4196.82 5277.96,4154.23 5300.18,4122.74 5250.18,4098.67 5240.92,4028.3 5376.11,4135.71 5774.26,4139.41 5781.66,4244.97
  pour cut-out net S$1709: 4615.88,4296.91 4710.33,4304.32 4776.99,4237.65 4625.14,4237.65
  pour cut-out net S$1809: 4907.29,3974.69 5022.29,3918.69 4951.29,3862.19
  pour cut-out net S$1809: 5007.84,4123.31 5031.18,4123.68 5029.7,4095.9 5007.1,4097.76
  pour cut-out net S$1999: 5094.88,4119.98 5122.29,4118.87 5123.03,4091.46 5093.4,4089.98
  pour cut-out net S$1003: 4817.12,4138.27 4828.97,4130.5 4819.34,4111.98 4804.16,4122.72
  pour cut-out net S$1588: 3435,5325 3650,5275 3855,5335 4000,5230 4015,5150 3330,5175 3335,5265 3335,5270
  pour cut-out net S$1588: 3285,4890 3320,4875 3365,4910 3360,4800 3400,4780 3415,4795 3440,4780 3440,4640 3320,4775
  pour cut-out net S$1588: 3375,5030 3475,5050 3415,4795 3370,4780
  pour cut-out net S$1588: 3650,4670 3795,4630 3720,4610 3675,4625
  pour cut-out: 3450,4655 3610,4650 3635,4610 3435,4620
  pour cut-out net S$3696: 3540,3385 3590,3365 3580,3320 3490,3330
  pour cut-out net S$1003: 4805,4205 4850,4200 4860,4125 4810,4125
  pour cut-out net S$1989: 4905,4195 4920,4195 4930,4180 4935,4170 4910,4170 4900,4190
  pour cut-out net S$1003: 4640,4205 4775,4200 4755,4165 4630,4150 4620,4175
  pour cut-out net S$1158: 4185,5060 4235,5055 4235,4985 4140,5000
  pour cut-out net S$1739: 4800,4945 4865,4950 4860,4680 4810,4655
  text "[A-Z]" at 4315.87,5048.45 h47.24
  text "PRocessor" at 4317.4,4916.54 h66.93

## Silkscreen, mask and mechanical layers (free items; w line width, h text height)
Bottom Overlay:
  text "JLCJLCJLC" at 5800,2565.47 h59.05
  text "https://github.com/hucuyuu" at 5795,2385 h80
Top Solder:
  region net S$937: 4505.15,3326.21 cw(c4397.74,3307.69) 4290.33,3289.17 cw(c4290.49,3289.63) 4290.63,3290.09 4505.15,3326.21
  region net S$1203: 4246.41,3435.17 4303.74,3489.84 4358.41,3441.84 4430.41,3488.51 4474.41,3445.84 4507.74,3464.51 4518.41,3400.51 4521.17,3364.61 4507.03,3360.87 4499.69,3359 4492.88,3355.29 4488.07,3351.79 4482.73,3346.96 4475.74,3337.84 4294.41,3309.84 4293.07,3309.84
  region net S$1126: 5095.09,3354.56 5172.5,3391.52 5228.42,3449.23 5113.76,3651.89 5048.42,3715.89 4976.42,3727.89 4961.76,3647.89 4871.09,3639.89 4865.76,3569.23 4921.76,3506.56 4951.09,3510.56 4972.42,3490.56
  region net S$1720: 3232.54,3916.39 3384.46,3953.57 3397.96,3961.57 3442.21,3951.82 3462.34,3943.94 3483.72,3929.29 3468.47,3917.29 3453.96,3902.32 3447.15,3886.63 3446.27,3870.94 3379.96,3869.07 3269.46,3809.57 3246.96,3840.07 3286.96,3862.07 3232.46,3857.07 3220.14,3890.15
  region: 3237.23,3881.68 cw(c3234.91,3898.92) 3232.58,3916.16 3237.23,3881.68
  region: 3269.66,3809.42 cw(c3257.62,3823.86) 3247.51,3839.71 3269.66,3809.42
  region: 3507.24,3772.76 cw(c3478.45,3776.67) 3449.66,3780.59 3507.24,3772.76
  region net S$1692: 3561.24,3860.97 3529.28,3834.86 3507.14,3772 3449.28,3779.86 3470.6,3852.94 3511.42,3844.86 3469.28,3870.57 3502.88,3919.17
  region net S$1588: 4883.71,4691.62 cw(c4892.04,4667.12) 4900.38,4642.63 cw(c4892,4651.63) 4883.63,4660.63 4883.71,4691.62
  region net S$1588: 4597.63,4628.63 4883.63,4691.63 4901.63,4642.13 4728.63,4585.63 4729.63,4574.13 4793.63,4541.13 4782.13,4498.13 4705.63,4514.63 4687.63,4528.63 4662.13,4527.63 4625.63,4593.13
  region: 4793.42,4541.05 cw(c4787.68,4519.69) 4781.94,4498.34 cw(c4782.15,4504.21) 4782.36,4510.08 4793.42,4541.05
  region net S$1588: 3520,4675 cw(c3491.43,4727.5) 3462.86,4780 cw(c3464.28,4779.63) 3465.72,4779.29 3520,4675
  region net S$1588: 3488.57,4669.29 3590.72,4667.86 3501.43,4727.86 3466.43,4780
Document:
  lines w0.1: 3959,4039 3961,4041